# Altium PCB EDR Project PCB_atmega328p.PcbDoc (part 1 of 2)
Units mm, origin at the board's own origin, x right, y up, seen from the top; angles counter-clockwise.
Board outline 105 x 60 mm, 2 copper layers (Top Layer, Bottom Layer); 62 components, 52 nets, 237 pads, 86 vias.
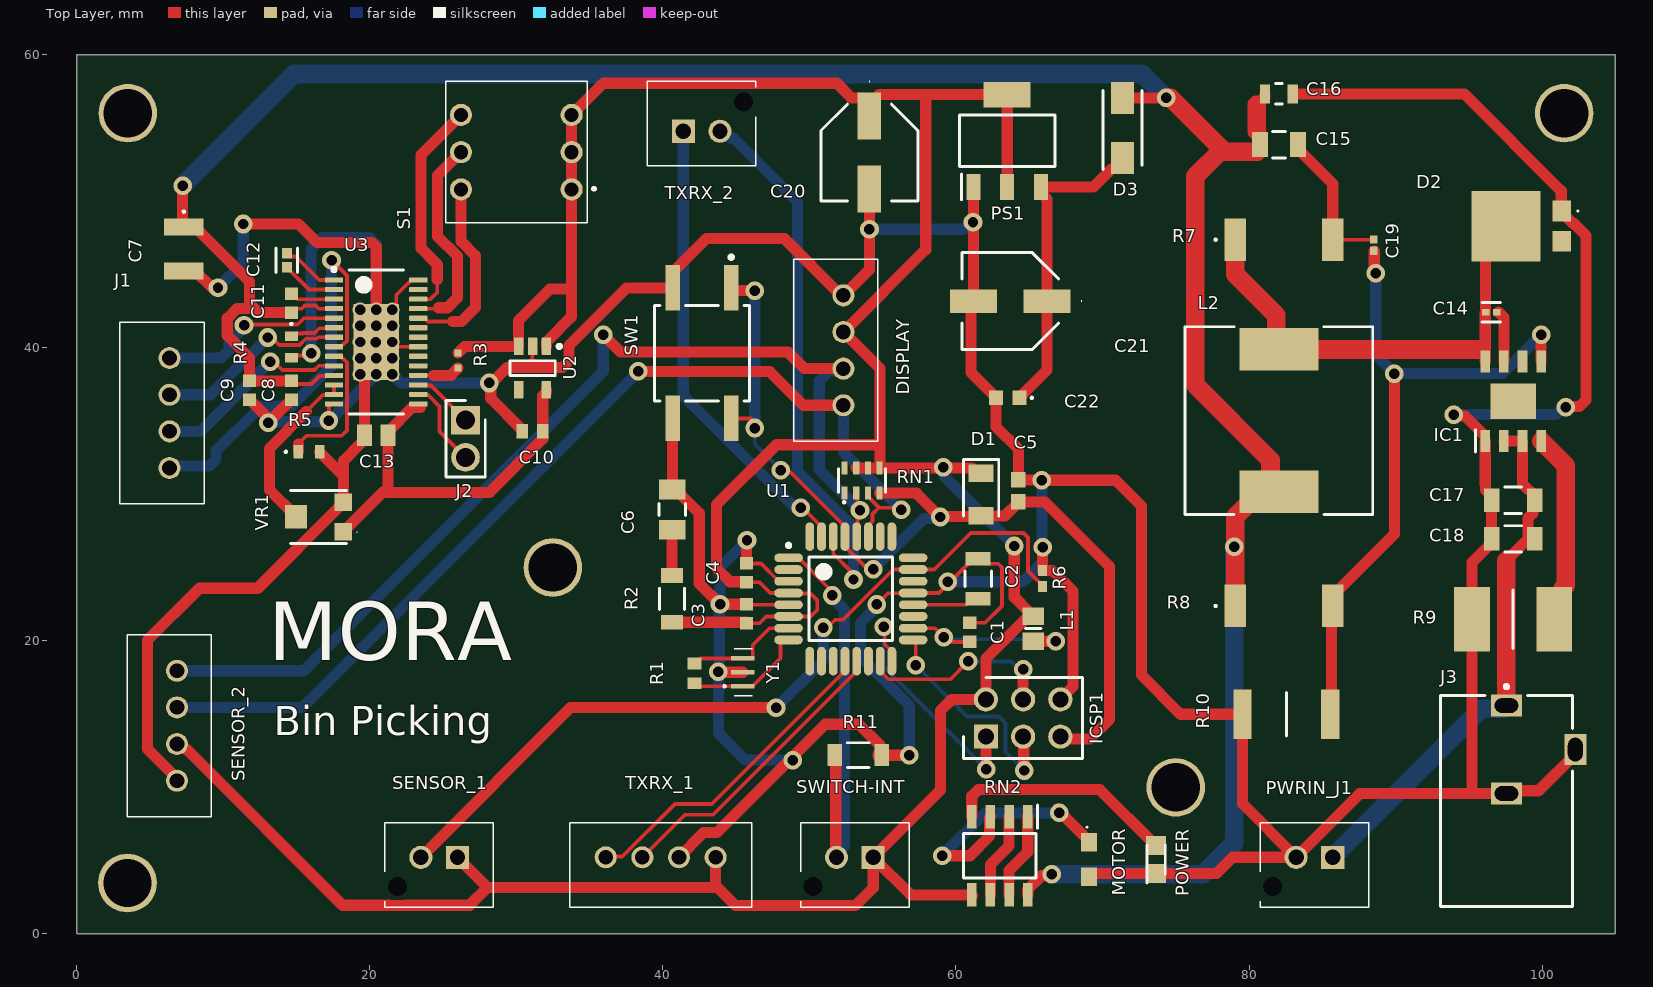
[diagram p0: Top Layer view]
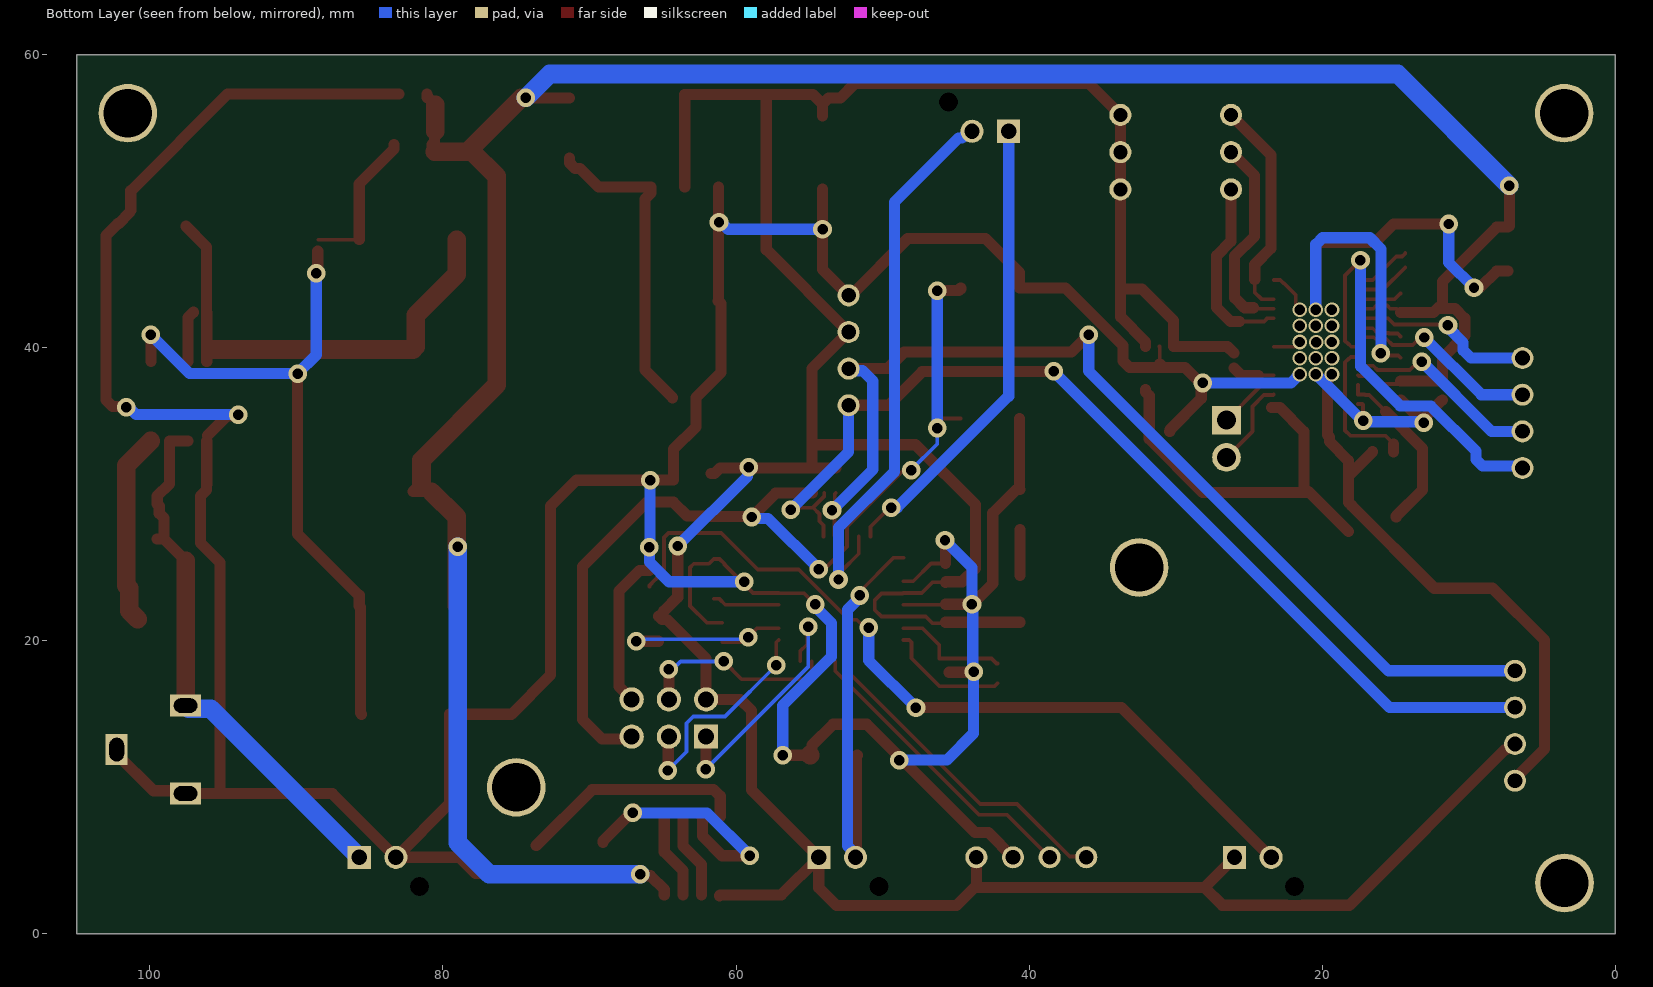
[diagram p1: Bottom Layer view, seen from below]

## Layer stack, top to bottom
Top Solder: solder mask 0.0102, Solder Resist, Dk 3.5
Top Layer: signal copper 0.0356
Dielectric 1: dielectric 0.32, FR-4, Dk 4.8
Bottom Layer: signal copper 0.0356
Bottom Solder: solder mask 0.0102, Solder Resist, Dk 3.5

## Board outline
0,0 105,0 105,60 0,60

## Design rules (kind name [scope] priority, off if disabled: settings)
BoardOutlineClearance [All] p1: gap=0.2 ignorepadtopadclearanceinfootprint=FALSE
Clearance [All] p1: gap=0.127 ignorepadtopadclearanceinfootprint=FALSE except(0.25: Arc-Hole Track-Hole SMDPad-Hole THPad-Hole Via-Hole Fill-Hole Poly-Hole Region-Hole Text-Hole)
ComponentClearance [All] p1: gap=0.127 collisioncheckmode=3 verticalgap=0.127 showdistances=TRUE
Height [All] p1: minheight=0 maxheight=1816.048 prefheight=12.7
HoleSize [All] p1: absolutevalues=TRUE maxlimit=6.3 minlimit=0.3 maxpercent=80.000 minpercent=20.000
HoleToHoleClearance [All] p1: gap=0.2 allowstackedmicrovias=FALSE
MinimumAnnularRing [All] p1: minimumring=0.076
MinimumSolderMaskSliver [All] p1: minsoldermaskwidth=0
PlaneClearance [All] p1: clearance=0.127
PlaneConnect PlaneConnectPowerPads [InPadClass('PowerPads')] p1: planeconnectstyle=Direct reliefexpansion=0.508 reliefentries=4 reliefconductorwidth=0.254 reliefairgap=0.254
PlaneConnect [All] p2: pad.planeconnectstyle=Relief pad.reliefexpansion=0.3 pad.reliefentries=4 pad.reliefconductorwidth=0.127 pad.reliefairgap=0.127 via.planeconnectstyle=Direct via.reliefexpansion=0.3 via.reliefentries=4 via.reliefconductorwidth=0.127 via.reliefairgap=0.127
PolygonConnect [All] p1: connectstyle=Relief reliefconductorwidth=0.254 reliefentries=4 polygonreliefangle="90 Angle" airgapwidth=0.254
RoutingVias [All] p1: holewidth=0.711 width=1.27 viastyle="Through Hole" minholewidth=0.711 minwidth=1.27 maxholewidth=0.711 maxwidth=1.27
SilkToSilkClearance [All] p1: silktosilkclearance=0
SilkToSolderMaskClearance [IsText] p1: minsilkscreentomaskgap=0.127 clearancetoexposedcopper=TRUE
SolderMaskExpansion [All] p1: expansion=0.075 istentingtop=FALSE
Width [All] p1: maxlimit=1.27 minlimit=0.254 preferedwidth=0.762
21 further rules are at their usual default settings.

## Classes and differential pairs
component class UART: DISPLAY TXRX_1 TXRX_2
component class "PRESSURE SENSOR": SENSOR_2
component class POWER: C14 C15 C16 C17 C18 C19 C20 C21 C22 D2 D3 IC1 J3 L2 PS1 PWRIN_J1 R7 R8 R9 R10
component class "MOTOR DRIVER": C7 C8 C9 C10 C11 C12 C13 J1 J2 R3 R4 R5 S1 U2 U3 VR1
component class "MEMBRANE SENSOR": R6 SENSOR_1
component class MCU: C1 C2 C3 C4 C5 C6 D1 ICSP1 L1 MOTOR POWER R1 R2 R11 RN1 RN2 SW1 SWITCH-INT U1 Y1

## Components (designator, comment, footprint, x,y, rotation, side; value= is the part's Value field where it differs from the comment)
C1 "06035C104KAT4A" CAPC1608X90X35LL15T15 60.945,20.574 r270 top value=100nF
C2 "CL31B106KBHNNNE" FP-CL31B106KBHNNNE-MFG 61.52,24.222 r90 top value=10uF
C3 "06035C104KAT4A" CAPC1608X90X35LL15T15 45.718,21.844 r270 top value=100nF
C4 "06035C104KAT4A" CAPC1608X90X35LL15T15 45.718,24.638 r270 top value=100nF
C5 "06035A220JAT4A" CAPC1608X90X35NL15T15 64.26,30.226 r270 top value=22pF
C6 "GRM31C5C1H104JA01L" FP-GRM31C-0_2-e0_3_0_8-IPC_B 40.638,28.956 r90 top
C7 "C1210C475J5RACAUTO" C1210 7.323,46.736 r270 top
C8 "06035C104KAT4A" CAPC1608X90X35LL15T15 14.66,37.084 r90 top value=100nF
C9 "06035C104KAT4A" CAPC1608X90X35LL15T15 11.809,37.084 r90 top value=100nF
C10 "C0603C105K3PACTU." CAPC1608X95N 31.113,34.29 r180 top
C11 "06035C104KAT4A" CAPC1608X90X35LL15T15 14.66,43.038 r270 top value=100nF
C12 "GRM155R71H103JA88D" FP-GRM155-0_05-IPC_A 14.349,45.974 r90 top
C13 "C0805C474J5REC7800" CAPC2012X110N 20.445,34.036 r180 top
C14 "GRM155R71H222JA01D" FP-GRM155-0_05-IPC_C 96.518,42.418 r0 top
C15 "12065C332KAT2A" FP-1206-L_3_2_0_2-W_1_6_0-IPC_C 82.04,53.848 r180 top
C16 "GRM21BR60J226ME39L" FP-GRM21B-0_15-MFG 82.04,57.315 r0 top
C17 "GCM31CR71H225KA55K" FP-GCM31C-0_2-e0_3_0_8-MFG 98.022,29.598 r180 top
C18 "GCM31CR71H225KA55K" FP-GCM31C-0_2-e0_3_0_8-MFG 98.022,26.95 r180 top
C19 "02015C560KAT2A" CAPC0603X33X15ML03T05 88.517,46.99 r90 top
C20 "EEE-1EA470WP" EEE1AA101SP 54.1,53.315 r270 top value=47uF
C21 "EEE-1EA470WP" EEE1AA101SP 63.712,43.18 r180 top value=47uF
C22 "C0603C104K5RAC3190" C0603 63.536,36.576 r180 top
D1 "CD1206-S01575" DIOC3215X95N 61.72,29.972 r270 top
D2 "V8P12-M3_86A" V8P12M386A 98.579,48.284 r90 top
D3 "CGRA4007-G" DIOM5127X229N 71.372,54.99 r90 top
DISPLAY "B4B-XH-A_LF__SN_" B4BXHALFSN 52.322,36.068 r90 top
IC1 "LM5012DDAR" SOIC127P600X170-9N 98.022,36.347 r90 top
ICSP1 "PH2-06-UA" HDRV6W64P254_2X3_762X500X901P 62.044,13.462 r0 top
J1 "B4B-XH-A_LF__SN_" B4BXHALFSN 6.348,31.79 r90 top
J2 "61300211121" HDRV2W110P0X254_1X2_508X254X854P 26.541,35.052 r270 top
J3 "PJ-102BH" CUI-PJ-102BH_V 97.559,12.576 r270 top
L1 "CV201210-100K" INDC2012X145N 65.276,20.828 r270 top
L2 "SRR1280-330M" FP-SRR1280-MFG 82.04,35.028 r270 top
MOTOR "APT2012SECK_J3-PRV" APT2012SECKJ3PRV 69.086,5.08 r270 top
POWER "KPT-2012SGC" LEDM2012X120N 73.658,5.08 r90 top
PS1 "SPX1117M3-L-5-0_TR" SOT230P700X170-4N 63.498,54.115 r90 top
PWRIN_J1 "B2B-XH-AM_LF__SN_" B2BXHAMLFSN 85.708,5.226 r180 top
R1 "ERJ-3GEYJ105V" RESC1608X55X30NL15T15 42.162,17.78 r90 top value=1M
R2 "RT1206BRD0710KL" FP-RT1206-MFG 40.638,22.86 r270 top value=10KΩ
R3 "ERA-2AEB152X" ERA2AED122X 26.033,39.116 r270 top
R4 "ERJ-3RSFR10V" ERJ3_B_BQ_BW_LW_(0603) 14.66,40.042 r270 top
R5 "ERJ-3RSFR10V" ERJ3_B_BQ_BW_LW_(0603) 15.86,32.893 r0 top
R6 "RC0402FR-074K7L" RESC1005X40N 65.911,24.257 r90 top
R7 "ERJ-S1TD4533U" ERJS1T_U1T_(2512) 82.39,47.371 r0 top
R8 "ERJ-S1TD4533U" ERJS1T_U1T_(2512) 82.39,22.377 r0 top
R9 "3540100KJT" RESC7142X120N 98.022,21.463 r180 top
R10 "CRCW251249K9FKEG" RESC6332X70N 82.548,14.986 r180 top
R11 "RT1206BRD0710KL" FP-RT1206-MFG 53.338,12.192 r180 top value=10KΩ
RN1 "CAY16-103J4GLF" CAY16-J4 53.592,30.937 r0 top value=10k
RN2 "AORN1001AT5" SOIC127P607X173-8N 62.99,5.334 r270 top
S1 "BD03" BD03 30.005,53.34 r90 top
SENSOR_1 "B2B-XH-AM_LF__SN_" B2BXHAMLFSN 25.993,5.226 r180 top
SENSOR_2 "B4B-XH-A_LF__SN_" B4BXHALFSN 6.856,10.454 r90 top
SW1 "1571634-2" FP-1571634-2-MFG 42.67,39.624 r270 top
SWITCH-INT "B2B-XH-AM_LF__SN_" B2BXHAMLFSN 54.354,5.226 r180 top
TXRX_1 "B4B-XH-A_LF__SN_" B4BXHALFSN 43.606,5.226 r180 top
TXRX_2 "B2B-XH-AM_LF__SN_" B2BXHAMLFSN 41.4,54.765 r0 top
U1 "ATmega328P-AU" 32A_M 52.83,22.86 r0 top
U2 "LP2985-33DBVR" DBV0005A_M 31.113,38.608 r270 top
U3 "DRV8825PWP" PWP0028C_L 20.445,40.386 r0 top
VR1 "TC33X-2-103E" TC33X2503E 16.51,28.448 r90 top
Y1 "CSTCE16M0V53-R0" CSTCE16M0V53R0 45.464,17.846 r270 top value=16MHz

## Footprints (in the part's own frame and the unit in brackets; to place one, negate y for a bottom-side part, rotate by r counter-clockwise, add the part's x,y. Pads: shape width x height; smd on the part's side, far side on the other; paste and mask are expansions set on the pad)
32A_M [mm] "Thin QFP, 32-Leads, Body 7x7mm, Pitch 0.8mm, IPC Low Density"
  oval 1.95x0.6 smd: 1(-4.25,2.8) 2(-4.25,2) 3(-4.25,1.2) 4(-4.25,0.4) 5(-4.25,-0.4) 6(-4.25,-1.2) 7(-4.25,-2) 8(-4.25,-2.8) 17(4.25,-2.8) 18(4.25,-2) 19(4.25,-1.2) 20(4.25,-0.4) 21(4.25,0.4) 22(4.25,1.2) 23(4.25,2) 24(4.25,2.8)
  oval 0.6x1.95 smd: 9(-2.8,-4.25) 10(-2,-4.25) 11(-1.2,-4.25) 12(-0.4,-4.25) 13(0.4,-4.25) 14(1.2,-4.25) 15(2,-4.25) 16(2.8,-4.25) 25(2.8,4.25) 26(2,4.25) 27(1.2,4.25) 28(0.4,4.25) 29(-0.4,4.25) 30(-1.2,4.25) 31(-2,4.25) 32(-2.8,4.25)
  silkscreen extent -4.37,-2.85 2.85,3.77, body extent -3.5,-3.5 3.5,3.5, height 1.2
APT2012SECKJ3PRV [mm]
  rect 1.25x1.1 smd: 1(-1.175,0) 2(1.175,0)
  silkscreen extent -2.25,-0.2 -2.15,-0.1, body extent -1,-0.63 1,0.63, height 0.85
B2BXHAMLFSN [mm]
  rect 1.575x1.575 hole 1.05: 1(0,0)
  round 1.575 hole 1.05: 2(2.5,0)
  round 0.65 hole 1.3 unplated: MH1(4.1,2)
  silkscreen extent -2.45,-2.35 4.95,3.4, body extent -2.45,-2.36 4.95,3.39, height 6.9
B4BXHALFSN [mm]
  round 1.5 hole 1: 1(0,0) 2(2.5,0) 3(5,0) 4(7.5,0)
  silkscreen extent -2.45,-2.35 9.95,3.4, body extent -2.45,-2.35 9.95,3.4, height 7.52
BD03 [mm]
  round 1.509 hole 0.97: 1(-2.54,-3.775) 2(-2.54,3.775) 3(0,-3.775) 4(0,3.775) 5(2.54,-3.775) 6(2.54,3.775)
  silkscreen extent -4.82,-5.4 4.82,4.82, body extent -4.82,-4.76 4.82,4.88, height 7.42
C0603 [mm]
  rect 0.95x1 smd: 1(-0.8,0) 2(0.8,0)
  silkscreen extent -1.7,-0.05 -1.6,0.05, body extent -0.87,-0.48 0.88,0.47, height 0.87
C1210 [mm]
  rect 1.15x2.7 smd: 1(-1.5,0) 2(1.5,0)
  silkscreen extent -2.6,-0.05 -2.5,0.05, body extent -1.7,-1.35 1.7,1.35, height 1.4
CAPC0603X33X15ML03T05 [mm] "Chip Capacitor, 2-Leads, Body 0.60x0.30mm, IPC Low Density"
  rect 0.56x0.52 smd: 1(-0.38,0) 2(0.38,0)
  body extent -0.31,-0.17 0.32,0.16, height 0.33
CAPC1608X90X35LL15T15 [mm] "Chip Capacitor, 2-Leads, Body 1.60x0.81mm, IPC High Density"
  rect 0.85x0.9 smd: 1(-0.65,0) 2(0.65,0)
  body extent -0.88,-0.48 0.87,0.48, height 0.9
CAPC1608X90X35NL15T15 [mm] "Chip Capacitor, 2-Leads, Body 1.60x0.81mm, IPC Medium Density"
  rect 1.05x1 smd: 1(-0.75,0) 2(0.75,0)
  body extent -0.88,-0.48 0.87,0.48, height 0.9
CAPC1608X95N [mm]
  rect 0.78x0.98 smd: 1(-0.7,0) 2(0.7,0)
  body extent -0.8,-0.4 0.8,0.4, height 0.95
CAPC2012X110N [mm]
  rect 1.02x1.47 smd: 1(-0.8,0) 2(0.8,0)
  body extent -1.1,-0.73 1.1,0.72, height 1.1
CAY16-J4 [mm]
  rect 0.425x0.9 smd: 1(-1.2,-0.85) 2(-1.2,0.85) 3(-0.4,-0.85) 4(-0.4,0.85) 5(0.4,-0.85) 6(0.4,0.85) 7(1.2,-0.85) 8(1.2,0.85)
  silkscreen extent -1.6,-1.53 1.6,0.8, body extent -1.6,-0.78 1.6,0.62, height 0.5
CSTCE16M0V53R0 [mm]
  rect 0.3x1.6 smd: 1(0.95,0) 2(0,0) 3(-0.95,0)
  silkscreen extent -1.6,-1.3 1.6,0.65, body extent -1.6,-0.65 1.6,0.65, height 0.9
CUI-PJ-102BH_V [mm] "THD, 3-Leads, Body 14.4x9mm, Height 11mm"
  rect 1.5x2.1 hole 1 slot 1.6 at 90 deg: 1(-3,0) 2(3,0)
  rect 2.1x1.5 hole 1 slot 1.6 at 0 deg: 3(0,4.7)
  silkscreen extent -4.42,-4.5 10.7,4.5, body extent -3.7,-4.5 10.7,4.9, height 11
DBV0005A_M [mm] "SOT23, 5-Leads, Body 3.05x1.75mm, Pitch 0.95mm, IPC Low Density"
  rrect15% 1.2x0.65 smd: 1(-1.475,0.95) 2(-1.475,0) 3(-1.475,-0.95) 4(1.475,-0.95) 5(1.475,0.95)
  silkscreen extent -1.6,-1.55 0.5,1.95, body extent -1.42,-1.46 1.42,1.46, height 1.08
DIOC3215X95N [mm]
  rect 1.2x1.7 smd: 1(-1.45,0) 2(1.45,0)
  silkscreen extent -2.4,-1.2 1.45,1.2, body extent -1.6,-0.75 1.6,0.75, height 0.95
DIOM5127X229N [mm]
  rect 2.2x1.55 smd: 1(-2.05,0) 2(2.05,0)
  silkscreen extent -2.83,-1.33 2.55,1.33, body extent -2.55,-1.33 2.55,1.33, height 2.29
EEE1AA101SP [mm]
  rect 3.2x1.6 smd: 1(-2.5,0) 2(2.5,0)
  silkscreen extent -4.88,-3.3 3.3,3.3, body extent -3.65,-3.3 3.65,3.3, height 5.8
ERA2AED122X [mm]
  rect 0.475x0.5 smd: 1(-0.512,0) 2(0.512,0)
  body extent -0.5,-0.25 0.5,0.25, height 0.35
ERJ3_B_BQ_BW_LW_(0603) [mm]
  rect 0.65x0.9 smd: 1(-0.725,0) 2(0.725,0)
  silkscreen extent -1.62,-0.05 -1.53,0.05, body extent -0.8,-0.4 0.8,0.4, height 0.55
ERJS1T_U1T_(2512) [mm]
  rect 1.45x2.9 smd: 1(-3.325,0) 2(3.325,0)
  silkscreen extent -4.72,-0.05 -4.62,0.05, body extent -3.2,-1.6 3.2,1.6, height 0.6
FP-1206-L_3_2_0_2-W_1_6_0-IPC_C [mm]
  rect 1.105x1.706 smd paste+0 mask+0: 1(-1.301,0) 2(1.301,0)
  silkscreen extent -0.45,-0.9 0.45,0.9, body extent -1.95,-1 1.95,1, height 0.25
FP-1571634-2-MFG [mm]
  rect 3.1x1 smd paste+0 mask+0: 1(-4.45,2) 2(4.45,2) 3(-4.45,-2) 4(4.45,-2)
  silkscreen extent -6.67,-3.25 3.25,3.25, body extent -6.1,-3.35 6.1,3.35, height 0.25
FP-CL31B106KBHNNNE-MFG [mm]
  rect 0.925x1.7 smd paste+0 mask+0: 1(-1.362,0) 2(1.363,0)
  silkscreen extent -0.53,-0.9 0.53,0.9, body extent -1.92,-1 1.92,1, height 0.25
FP-GCM31C-0_2-e0_3_0_8-MFG [mm]
  rect 1.05x1.6 smd paste+0 mask+0: 1(-1.475,0) 2(1.475,0)
  silkscreen extent -0.57,-0.9 0.58,0.9, body extent -2.1,-1 2.1,1, height 0.25
FP-GRM21B-0_15-MFG [mm]
  rect 0.7x1.3 smd paste+0 mask+0: 1(-0.95,0) 2(0.95,0)
  silkscreen extent -0.22,-0.7 0.22,0.7, body extent -1.4,-0.8 1.4,0.8, height 0.25
FP-GRM31C-0_2-e0_3_0_8-IPC_B [mm]
  rect 1.355x1.806 smd paste+0 mask+0: 1(-1.376,0) 2(1.376,0)
  silkscreen extent -0.4,-0.9 0.4,0.9, body extent -2.3,-1.15 2.3,1.15, height 0.25
FP-GRM155-0_05-IPC_A [mm]
  rect 0.715x0.672 smd paste+0 mask+0: 1(-0.479,0) 2(0.479,0)
  silkscreen extent -0.84,-0.74 0.84,0.74, body extent -1.04,-0.54 1.04,0.54, height 0.25
FP-GRM155-0_05-IPC_C [mm]
  rect 0.515x0.472 smd paste+0 mask+0: 1(-0.379,0) 2(0.379,0)
  silkscreen extent -0.64,-0.67 0.64,0.67, body extent -0.74,-0.38 0.74,0.38, height 0.25
FP-RT1206-MFG [mm]
  rect 1x1.5 smd paste+0 mask+0: 1(-1.6,0) 2(1.6,0)
  silkscreen extent -0.73,-0.85 0.73,0.85, body extent -2.2,-0.95 2.2,0.95, height 0.25
FP-SRR1280-MFG [mm]
  rect 2.9x5.4 smd paste+0 mask+0: 1(-4.85,0) 2(4.85,0)
  silkscreen extent -6.4,-6.4 6.4,6.4, body extent -6.5,-6.5 6.5,6.5, height 0.25
HDRV2W110P0X254_1X2_508X254X854P [mm]
  rect 1.95x1.95 hole 1.3: 1(0,0)
  round 1.95 hole 1.3: 2(2.54,0)
  silkscreen extent -1.34,-1.34 3.88,1.34, body extent -1.27,-1.27 3.81,1.27, height 8.54
HDRV6W64P254_2X3_762X500X901P [mm]
  rect 1.65x1.65 hole 1.1: 1(0,0)
  round 1.65 hole 1.1: 2(0,2.54) 3(2.54,0) 4(2.54,2.54) 5(5.08,0) 6(5.08,2.54)
  silkscreen extent -1.52,-1.48 6.6,4.02, body extent -1.27,-1.23 6.35,3.77, height 9.01
INDC2012X145N [mm]
  rect 1.2x1.45 smd: 1(-0.85,0) 2(0.85,0)
  silkscreen extent 0,-0.53 0,0.53, body extent -1,-0.63 1,0.63, height 1.45
LEDM2012X120N [mm]
  rect 1.3x1.35 smd: 1(-0.95,0) 2(0.95,0)
  silkscreen extent -1.6,-0.62 1,0.62, body extent -1.02,-0.6 1.02,0.6, height 0.77
PWP0028C_L [mm] "SOP, 28-Leads, Body 9.8x4.5mm, Pitch 0.65mm, Thermal Pad 5.18x3.1mm, IPC High Density"
  rrect29% 1.25x0.35 smd: 1(-2.875,4.225) 2(-2.875,3.575) 3(-2.875,2.925) 4(-2.875,2.275) 5(-2.875,1.625) 6(-2.875,0.975) 7(-2.875,0.325) 8(-2.875,-0.325) 9(-2.875,-0.975) 10(-2.875,-1.625) 11(-2.875,-2.275) 12(-2.875,-2.925) 13(-2.875,-3.575) 14(-2.875,-4.225) 15(2.875,-4.225) 16(2.875,-3.575) 17(2.875,-2.925) 18(2.875,-2.275) 19(2.875,-1.625) 20(2.875,-0.975) 21(2.875,-0.325) 22(2.875,0.325) 23(2.875,0.975) 24(2.875,1.625) 25(2.875,2.275) 26(2.875,2.925) 27(2.875,3.575) 28(2.875,4.225)
  rrect3% 3.1x5.18 smd: 29(0,0)
  silkscreen extent -3,-4.9 1.85,5.07, body extent -2.25,-4.9 2.25,4.9, height 1.2
RESC1005X40N [mm]
  rect 0.75x0.6 smd: 1(-0.55,0) 2(0.55,0)
  body extent -0.5,-0.25 0.5,0.25, height 0.4
RESC1608X55X30NL15T15 [mm] "Chip Resistor, 2-Leads, Body 1.60x0.80mm, IPC Medium Density"
  rect 0.8x0.95 smd: 1(-0.675,0) 2(0.675,0)
  body extent -0.87,-0.48 0.87,0.48, height 0.55
RESC6332X70N [mm]
  rect 1.25x3.35 smd: 1(-3,0) 2(3,0)
  silkscreen extent 0,-1.47 0,1.47, body extent -3.15,-1.58 3.15,1.58, height 0.7
RESC7142X120N [mm]
  rect 2.45x4.4 smd: 1(-2.8,0) 2(2.8,0)
  silkscreen extent 0,-2 0,2, body extent -3.55,-2.1 3.55,2.1, height 1.2
SOIC127P600X170-9N [mm]
  rect 1.525x0.65 smd: 1(-2.712,1.905) 2(-2.712,0.635) 3(-2.712,-0.635) 4(-2.712,-1.905) 5(2.712,-1.905) 6(2.712,-0.635) 7(2.712,0.635) 8(2.712,1.905)
  rect 2.4x3.1 smd: 9(0,0)
  silkscreen extent -3.48,2.58 -1.95,2.58, body extent -3,-2.45 3,2.45, height 1.57
SOIC127P607X173-8N [mm]
  rect 1.6x0.65 smd: 1(-2.675,1.905) 2(-2.675,0.635) 3(-2.675,-0.635) 4(-2.675,-1.905) 5(2.675,-1.905) 6(2.675,-0.635) 7(2.675,0.635) 8(2.675,1.905)
  silkscreen extent -3.48,-2.47 1.53,2.58, body extent -3.04,-2.46 3.04,2.46, height 1.73
SOT230P700X170-4N [mm]
  rect 1.75x0.95 smd: 1(-3.15,2.3) 2(-3.15,0) 3(-3.15,-2.3)
  rect 1.75x3.2 smd: 4(3.15,0)
  silkscreen extent -4.02,-3.25 1.75,3.25, body extent -3.5,-3.25 3.5,3.25, height 1.7
TC33X2503E [mm]
  rect 1.2x1.2 smd: 1(-1,-1.7) 3(1,-1.7)
  rect 1.6x1.5 smd: 2(0,1.55)
  silkscreen extent -1.8,-2.64 1.8,1.9, body extent -1.5,-2 1.5,1.8, height 1.22
V8P12M386A [mm]
  rect 1.4x1.27 smd: 1(1.04,-2.765) 2(-1.04,-2.765)
  rect 4.8x4.72 smd: 3(0,1.04)
  silkscreen extent 0.99,-3.9 1.09,-3.8, body extent -2.15,-3.27 2.15,3.05, height 1.3

## Part data
C1 C3 C4 C8 C9 C11: library part CMP-2006-04390-1, Manufacturer="AVX Interconnect / Elco", Part Number=06035C104KAT4A
C2: library part CMP-2000-07530-2, "CAP CER 10UF 50V X7R 1206", Capacitance=10uF, Manufacturer=Samsung, Temperature="-55°C to +125°C", Temperature Characteristic=X7R, Temperature Coefficient=15%, Temperature Range High=+125°C, Temperature Range Low=-55°C, Tolerance=10%, Voltage Rating=50V, Automotive=No, Category=Cap, ComponentLink2Description=Datasheet, ComponentLink2URL=http://www.samsungsem.com/global/front/downloadcms.do?path=%2F%2Fglobal%2F%2Fsupport%2F%2Fproduct-search%2F%2Fmlcc%2F%2F__icsFiles%2F%2Fafieldfile%2F%2F2019%2F%2F06%2F%2F18&fileName=CL31B106KBHNNNE-19.pdf, Device Class L1="Passive Components", Device Class L2=Capacitors, Device Class L3="Ceramic Capacitors", Digikey Description="CAP CER 10UF 50V X7R 1206", Height=1.8mm, Lead Free=Yes, Manufacturer Part Number=CL31B106KBHNNNE, Material=Ceramic, Octopart=https://octopart.com/cl31b106kbhnnne-samsung-30507377, Package=CL31B106KBHNNNE, RoHS=TRUE
C5: library part CMP-2006-04271-1, Manufacturer="AVX Interconnect / Elco", Part Number=06035A220JAT4A
C6: library part CMP-06035-003994-1, "Chip Multilayer Ceramic Capacitors for General Purpose, 1206, 0.10uF, C0G, 30ppm/°C, 5%, 50V", Capacitance=100nF, Case Code (Imperial)=1206, Case Code (Metric)=3216, Dielectric=C0G, Max Operating Temperature=125°C, Min Operating Temperature=-55°C, Package Quantity=1, Temperature Coefficient=30ppm/°C, Tolerance=5%, Voltage=50V, Case/Package=1206, Depth=1.6mm, Height=1.6mm, Lead Free="Lead Free", Length=3.2mm, Material=Ceramic, Mount="Surface Mount", Packaging="Tape and Reel", Radiation Hardening=No, REACH SVHC="No SVHC", Termination=SMD/SMT, Thickness=0.071inch, Voltage Rating=50V, Voltage Rating (DC)=50V, Weight=0.000571oz, Width=0.063inch
C7: "Capacitor", Capacitance=4..7uF, Manufacturer_Name=KEMET, Mouser Part Number=80-C1210C475J5RAUTO, Datasheet Link=https://content.kemet.com/datasheets/KEM_C1023_X7R_AUTO_SMD.pdf, Manufacturer_Part_Number=C1210C475J5RACAUTO, Mouser Price/Stock=https://www.mouser.co.uk/ProductDetail/KEMET/C1210C475J5RACAUTO?qs=sSYV1F9c5cHOvq7Y3pUhfA%3D%3D
C10: "Capacitor", Capacitance=1uF, Manufacturer_Name=KEMET, Mouser Part Number=N/A, Datasheet Link=https://www.kemet.com/specsheet/C0603C105K3PACTU, Height=0.95mm, Manufacturer_Part_Number=C0603C105K3PACTU., Mouser Price/Stock=https://www.mouser.com/Search/Refine.aspx?Keyword=N%2FA
C12: library part CMP-2008-04636-2, "Chip Multilayer Ceramic Capacitors for General Purpose, 0402, 10000pF, X7R, 15%, 5%, 50V", Capacitance=10nF, Case Code (Imperial)=0402, Case Code (Metric)=1005, Dielectric=X7R, Max Operating Temperature=125°C, Min Operating Temperature=-55°C, Package Quantity=10000, Tolerance=5%, Voltage=50V, Case/Package=0402, Depth=0.5mm, Height=0.5mm, Lead Free="Lead Free", Length=1mm, Material=Ceramic, Mount="Surface Mount", Packaging="Tape and Reel", Termination=SMD/SMT, Thickness=0.022inch, Voltage Rating=50V, Voltage Rating (DC)=50V, Width=0.5mm
C13: "Capacitor", Capacitance=0.47uF, Manufacturer_Name=KEMET, Mouser Part Number=N/A, Datasheet Link=https://api.kemet.com/component-edge/download/datasheet/C0805C474J5REC7800.pdf, Height=1.1mm, Manufacturer_Part_Number=C0805C474J5REC7800, Mouser Price/Stock=https://www.mouser.co.uk/ProductDetail/KEMET/C0805C474J5REC7800?qs=xZ%2FP%252Ba9zWqYCFwa%2FovZJlA%3D%3D
C14: library part CMP-2008-04651-2, "Chip Multilayer Ceramic Capacitors for General Purpose, 0402, 2200pF, X7R, 15%, 5%, 50V", Capacitance=2.2nF, Case Code (Imperial)=0402, Case Code (Metric)=1005, Dielectric=X7R, Max Operating Temperature=125°C, Min Operating Temperature=-55°C, Package Quantity=10000, Tolerance=5%, Voltage=50V, Case/Package=0402, Depth=0.5mm, Height=0.5mm, Lead Free="Lead Free", Length=1mm, Mount="Surface Mount", Packaging="Tape and Reel", Radiation Hardening=No, Termination=SMD/SMT, Thickness=0.022inch, Voltage Rating=50V, Voltage Rating (DC)=50V, Width=0.02inch
C15: library part CMP-04427-015080-1, "General Purpose Ceramic Capacitor, 1206, 3.3nF, 10%, X7R, 15%, 50V", Capacitance=3.3nF, Case Code (Imperial)=1206, Case Code (Metric)=3216, Dielectric=X7R, Dielectric Material=Ceramic, Max Operating Temperature=125°C, Min Operating Temperature=-55°C, Package Quantity=1, Tolerance=10%, Voltage=50V, Case/Package=1206, Construction=Flat, Contact Plating=Tin, Depth=1.6mm, Dissipation Factor=2.5%, Height=0.94mm, Lead Free="Lead Free", Length=3.2mm, Mount="Surface Mount", Number of Pins=2, Packaging="Tape and Reel", REACH SVHC="No SVHC", RoHS Compliant=Yes, Series=-, Termination=SMD/SMT, Thickness=0.037inch, Voltage Rating=50V, Voltage Rating (DC)=50V, Width=1.6mm
C16: library part CMP-2007-03385-2, "Chip Multilayer Ceramic Capacitors for General Purpose, 0805, 22uF, X5R, 15%, 20%, 6.3V", Capacitance=22uF, Case Code (Imperial)=0805, Case Code (Metric)=2012, Dielectric=X5R, Max Operating Temperature=85°C, Min Operating Temperature=-55°C, Package Quantity=1, Tolerance=20%, Voltage=6.3V, Case/Package=0805, Depth=1.25mm, Height=1.25mm, Lead Free="Lead Free", Length=2mm, Material=Ceramic, Mount="Surface Mount", Packaging="Tape and Reel", Radiation Hardening=No, REACH SVHC="No SVHC", Termination=SMD/SMT, Thickness=0.053inch, Voltage Rating=6.3V, Voltage Rating (DC)=6.3V, Width=0.049inch
C17 C18: library part CMP-06035-059276-1, "Ceramic Capacitor for Automotive 2.2uF ±10% 50VDC X7R 1206 Embossed T/R", Capacitance=2.2uF, Case Code (Imperial)=1206, Case Code (Metric)=3216, Dielectric=X7R, Max Operating Temperature=125°C, Min Operating Temperature=-55°C, Package Quantity=6000, Ratings=AEC-Q200, Tolerance=10%, Voltage Rating=50V, Case/Package=1206, Depth=1.6mm, Height=1.6mm, Lead Free="Lead Free", Length=3.2mm, Mount="Surface Mount", Packaging="Tape and Reel", Radiation Hardening=No, Termination=SMD/SMT, Thickness=0.071inch, Voltage Rating (DC)=50V, Width=0.063inch
C19: library part CMP-2010-00470-1, Capacitance=56pF, Manufacturer="AVX Interconnect / Elco", Part Number=02015C560KAT2A
C20 C21: "Capacitor Polarised", Manufacturer_Name=Panasonic, Mouser Part Number=667-EEE-1EA470WP, Voltage=25V, Arrow Part Number=EEE-1EA470WP, Arrow Price/Stock=https://www.arrow.com/en/products/eee-1ea470wp/panasonic?region=nac, Datasheet Link=http://industrial.panasonic.com/cdbs/www-data/pdf/RDE0000/ABA0000C1145.pdf, Height=7.8mm, Manufacturer_Part_Number=EEE-1EA470WP, Mouser Price/Stock=https://www.mouser.co.uk/ProductDetail/Panasonic/EEE-1EA470WP?qs=ANJC8C65Mw4aAM55A7BE%2Fw%3D%3D
C22: "Capacitor", Capacitance=100nF, Manufacturer_Name=KEMET, Mouser Part Number=80-C0603C104K5R3190, Arrow Part Number=C0603C104K5RAC3190, Arrow Price/Stock=https://www.arrow.com/en/products/c0603c104k5rac3190/kemet-corporation?region=nac, Datasheet Link=https://content.kemet.com/datasheets/KEM_C1023_X7R_AUTO_SMD.pdf, Height=0.87mm, Manufacturer_Part_Number=C0603C104K5RAC3190, Mouser Price/Stock=https://www.mouser.co.uk/ProductDetail/KEMET/C0603C104K5RAC3190?qs=OycAS1CGnljhMsmpVYrMLA%3D%3D
D1: "Diode", Manufacturer_Name=Bourns, Mouser Part Number=652-CD1206-S01575, Arrow Part Number=CD1206-S01575, Arrow Price/Stock=https://www.arrow.com/en/products/cd1206-s01575/bourns, Datasheet Link=https://datasheet.datasheetarchive.com/originals/distributors/SFDatasheet-7/sf-000140098.pdf, Height=0.95mm, Manufacturer_Part_Number=CD1206-S01575, Mouser Price/Stock=https://www.mouser.co.uk/ProductDetail/Bourns/CD1206-S01575?qs=FITO%2F%2FQgYDlGQsqciGRLTg%3D%3D
D2: "Diode", Arrow Part Number=V8P12-M3/86A, Manufacturer_Name=Vishay, Mouser Part Number=78-V8P12-M3/86A, Arrow Price/Stock=https://www.arrow.com/en/products/v8p12-m386a/vishay?region=nac, Datasheet Link=https://www.vishay.com/docs/89170/v8p12.pdf, Height=1.2mm, Manufacturer_Part_Number=V8P12-M3/86A, Mouser Price/Stock=https://www.mouser.co.uk/ProductDetail/Vishay-General-Semiconductor/V8P12-M3-86A?qs=HSPD0Bff7iYR%2FGS73JOLOg%3D%3D, Name="Schottkey diode"
D3: "Integrated Circuit", Manufacturer_Name="Comchip Technology", Mouser Part Number=750-CGRA4007-G, Arrow Part Number=CGRA4007-G, Arrow Price/Stock=https://www.arrow.com/en/products/cgra4007-g/comchip-technology, Datasheet Link=http://www.mouser.com/datasheet/2/80/CGRA4001-G_Thru647977._CGRA4007-G_RevE-1481051.pdf, Height=2.29mm, Manufacturer_Part_Number=CGRA4007-G, Mouser Price/Stock=https://www.mouser.co.uk/ProductDetail/Comchip-Technology/CGRA4007-G?qs=tw%252BuQ%2FB6PO1Jgp22ji8v0g%3D%3D
DISPLAY J1 SENSOR_2 TXRX_1: "Connector", Arrow Part Number=B4B-XH-A(LF)(SN), Manufacturer_Name="JST (JAPAN SOLDERLESS TERMINALS)", Arrow Price/Stock=https://www.arrow.com/en/products/b4b-xh-a-lf-sn/jst-manufacturing?region=europe, Datasheet Link=https://datasheet.lcsc.com/szlcsc/JST-Sales-America-B4B-XH-A-LF-SN_C144395.pdf, Height=7mm, Manufacturer_Part_Number=B4B-XH-A(LF)(SN)
  DISPLAY: Name="OLED DISPLAY"
  J1: Name=STEPPER
  SENSOR_2: Name="PRESSURE SENSOR"
  TXRX_1: Name=2-JST
IC1: "Integrated Circuit", Manufacturer_Name="Texas Instruments", Mouser Part Number=595-LM5012DDAR, Arrow Part Number=LM5012DDAR, Arrow Price/Stock=https://www.arrow.com/en/products/lm5012ddar/texas-instruments?region=nac, Datasheet Link=https://www.ti.com/lit/ds/symlink/lm5012.pdf?ts=1682242115443&ref_url=https%253A%252F%252Fwww.ti.com%252Fproduct%252FLM5012, Height=1.7mm, Manufacturer_Part_Number=LM5012DDAR, Mouser Price/Stock=https://www.mouser.co.uk/ProductDetail/Texas-Instruments/LM5012DDAR?qs=T%252BzbugeAwjjzO1eNFM2OsQ%3D%3D
ICSP1: "Connector", Manufacturer_Name="Adam Tech", Arrow Part Number=PH2-06-UA, Arrow Price/Stock=https://www.arrow.com/en/products/ph2-06-ua/adam-tech?region=nac, Datasheet Link=https://datasheet.datasheetarchive.com/originals/distributors/Datasheets_SAMA/c63e3fe101e7b6e3957e7ad4a1a98367.pdf, Height=9.008mm, Manufacturer_Part_Number=PH2-06-UA
J2: "Connector", Manufacturer_Name="Wurth Elektronik", Mouser Part Number=710-61300211121, Datasheet Link=https://componentsearchengine.com/Datasheets/2/61300211121.pdf, Height=8.54mm, Manufacturer_Part_Number=61300211121, Mouser Price/Stock=https://www.mouser.co.uk/ProductDetail/Wurth-Elektronik/61300211121?qs=t4813l51qx%252B1A5GYDQxPlw%3D%3D
J3: library part CMP-2000-06901-1, "Through Hole Right Angle DC Power Jack, 5 A, 2.5 mm Center Pin, 3 Position, -25 to 85 degC, RoHS, Bulk", Current Rating=5A, Flammability Rating=UL94V-0, Insulation Resistance=100MOhms, Manufacturer=CUIInc., Operating Temperature Range=-25Cto+85C, Package Description="3-Pin Through Hole Device, Body 14.4 x 9 mm, Height 11 mm", Voltage Rating=24V, Brand=CUI, Connector Type=DCPowerJack, Contact Gender=Male, Contact Material=Copper, Contact Plating=Nickel, Datasheet URL=http://www.cui.com/product/resource/pj-102bh.pdf, Datasheet Version="Rev. 1.02, 05/2016", Factory Pack Quantity=280, Housing Material=PolybutyleneTerephthalate(PBT), Inside Contact Diameter=2.5mm, Manufacturer URL=http://www.cui.com/, Mounting Angle=Right, Mounting Style=ThroughHole, Mounting Technology=ThroughHole, Name=PWRIN, Outside Contact Diameter=6.5mm, Package Reference=PJ-102BH, Product=Jacks, Product Category=DCPowerConnectors, RoHS=True, Termination Style=ThroughHole
L1: "Inductor", Manufacturer_Name=Bourns, Mouser Part Number=652-CV201210-100K, Arrow Part Number=CV201210-100K, Arrow Price/Stock=https://www.arrow.com/en/products/cv201210-100k/bourns?region=nac, Datasheet Link=https://www.bourns.com/docs/Product-Datasheets/CV201210.pdf, Height=1.45mm, Manufacturer_Part_Number=CV201210-100K, Mouser Price/Stock=https://www.mouser.co.uk/ProductDetail/Bourns/CV201210-100K?qs=k2%252BVLg4AuuRLt64STpwovw%3D%3D
L2: library part CMP-2000-07148-2, "FIXED IND 33UH 3.5A 57 MOHM SMD", Case/Package=Nonstandard, Current Rating=3.5A, DC Resistance (DCR)=57mR, Frequency=9.5MHz, Inductance=33uH, Inductance Tolerance=20%, Max Operating Temperature=125°C, Min Operating Temperature=-40°C, Package Quantity=400, Resistance=57MR, Resistor Type=Wirewound, Saturation Current=3.3A, Test Frequency=100kHz, Core Material=Ferrite, DC Current=3.5A, Depth=12.8mm, Height=7.5mm, Height - Seated (Max)=0.315inch, Length=12.5mm, Material=Steel, Max DC Current=3.5A, Military Standard=Not, Mount="Surface Mount", Number of Pins=2, Packaging="Tape and Reel", Q Factor=28, Radiation Hardening=No, REACH SVHC="No SVHC", RMS Current (Irms)=3.5A, RoHS Compliant=Yes, Sample Rate (Hz)=100kHz, Self Resonant Frequency=9.5MHz, Series=SRR1280, Shielding=Shielded, Termination=SMD/SMT, Tolerance=20%, Width=12.5mm
MOTOR: "LED", Arrow Part Number=APT2012SECK/J3-PRV, COLOR=RED, Manufacturer_Name=Kingbright, Mouser Part Number=604-APT2012SECKJ3PRV, Arrow Price/Stock=https://www.arrow.com/en/products/apt2012seckj3-prv/kingbright?region=nac, Datasheet Link=https://www.mouser.de/datasheet/2/216/APT2012SECK-J3-PRV-1173389.pdf, Height=0.85mm, Manufacturer_Part_Number=APT2012SECK/J3-PRV, Mouser Price/Stock=https://www.mouser.co.uk/ProductDetail/Kingbright/APT2012SECK-J3-PRV?qs=D2TOvUWgdJ6T9J6WfI%252BQOg%3D%3D
POWER: "LED", COLOR=GREEN, Manufacturer_Name=Kingbright, Mouser Part Number=N/A, Arrow Part Number=KPT-2012SGC, Arrow Price/Stock=https://www.arrow.com/en/products/kpt-2012sgc/kingbright?region=europe, Datasheet Link=https://componentsearchengine.com/Datasheets/2/KPT-2012SGC.pdf, Height=1.2mm, Manufacturer_Part_Number=KPT-2012SGC, Mouser Price/Stock=https://www.mouser.co.uk/ProductDetail/Kingbright/KPT-2012SGC?qs=2JU0tDl2GZ3Evsz5LVxRxw%3D%3D
PS1: "Power Supply", Arrow Part Number=SPX1117M3-L-5-0/TR, Manufacturer_Name=EXAR, Mouser Part Number=701-SPX1117M3-L-50TR, Arrow Price/Stock=https://www.arrow.com/en/products/spx1117m3-l-5-0tr/exar, Datasheet Link=https://datasheet.datasheetarchive.com/originals/distributors/Datasheets-DGA25/1769206.pdf, Height=1.7mm, Manufacturer_Part_Number=SPX1117M3-L-5-0/TR, Mouser Price/Stock=https://www.mouser.com/Search/Refine.aspx?Keyword=701-SPX1117M3-L-50TR, Name="REG IC"
PWRIN_J1 SENSOR_1 SWITCH-INT TXRX_2: "Connector", Arrow Part Number=B2B-XH-AM(LF)(SN), Manufacturer_Name="JST (JAPAN SOLDERLESS TERMINALS)", Arrow Price/Stock=https://www.arrow.com/en/products/b2b-xh-am-lf-sn/jst-manufacturing?region=europe, Datasheet Link=https://www.jst-mfg.com/product/pdf/eng/eXH.pdf, Height=7mm, Manufacturer_Part_Number=B2B-XH-AM(LF)(SN), Name=2-JST
R1: library part CMP-2000-00706-1, Manufacturer=Panasonic, Part Number=ERJ-3GEYJ105V
R2 R11: library part CMP-2003-04273-2, "RES 10.0K OHM 1/4W .1% SMD 1206", Manufacturer=Yageo, Package=RT1206, Power Rating=0.25W, Resistance=10KΩ, Temperature="-55°C to +155°C", Temperature Coefficient="25 ppm/°C", Temperature Range High=+155°C, Temperature Range Low=-55°C, Tolerance=0.005, Voltage Rating=200V, Automotive=No, Category=Res, ComponentLink2Description=Datasheet, ComponentLink2URL=http://www.yageo.com/documents/recent/PYu-RT_1-to-0.01_RoHS_L_9.pdf, Composition="Thin Film", Device Class L1="Passive Components", Device Class L2=Resistors, Device Class L3="Chip SMD Resistors", Digikey Description="RES 10.0K OHM 1/4W .1% SMD 1206", Footprint Url=http://www.yageo.com/exep/pages/download/literatures/PYu-R_Mount_10.pdf, Height=0.65mm, Ipc Land Pattern Name=RESC310160X55, Lead Free=Yes, Manufacturer Part Number=RT1206BRD0710KL, Mouser Description="High Precision-High Stability Chip Resistor Thin Film 1206 10kOhm 0.1% Paper T/R", Octopart=https://octopart.com/rt1206brd0710kl-yageo-1397513, RoHS=TRUE, Series=RT
R3: "Resistor", Manufacturer_Name=Panasonic, Mouser Part Number=667-ERA-2AEB152X, Resistance=1.5k, Arrow Part Number=ERA-2AEB152X, Arrow Price/Stock=https://www.arrow.com/en/products/era-2aeb152x/panasonic?region=nac, Datasheet Link=http://industrial.panasonic.com/cdbs/www-data/pdf/RDM0000/AOA0000C307.pdf, Height=0.4mm, Manufacturer_Part_Number=ERA-2AEB152X, Mouser Price/Stock=https://www.mouser.co.uk/ProductDetail/Panasonic/ERA-2AEB152X?qs=YFwoyZoVY0iUWeAxCO29sQ%3D%3D
R4 R5: "Resistor", Manufacturer_Name=Panasonic, Mouser Part Number=667-ERJ-3RSFR10V, Resistance=0.1ohm, Arrow Part Number=ERJ-3RSFR10V, Arrow Price/Stock=https://www.arrow.com/en/products/erj-3rsfr10v/panasonic?region=nac, Datasheet Link=http://industrial.panasonic.com/cdbs/www-data/pdf/RDN0000/AOA0000C313.pdf, Manufacturer_Part_Number=ERJ-3RSFR10V, Mouser Price/Stock=https://www.mouser.co.uk/ProductDetail/Panasonic/ERJ-3RSFR10V?qs=aGgfWYEhH7mX3YEBaR1Eig%3D%3D
R6: "Resistor", Manufacturer_Name=KEMET, Mouser Part Number=603-RC0402FR-074K7L, Resistance=4.7k, Arrow Part Number=RC0402FR-074K7L, Arrow Price/Stock=https://www.arrow.com/en/products/rc0402fr-074k7l/yageo, Datasheet Link=http://www.yageo.com/documents/recent/PYu-RC0402_51_RoHS_L_6_r.pdf, Height=0.4mm, Manufacturer_Part_Number=RC0402FR-074K7L, Mouser Price/Stock=https://www.mouser.co.uk/ProductDetail/YAGEO/RC0402FR-074K7L?qs=V1yeUXFNrkn%2FmCXC8N8TTA%3D%3D
R7 R8: "Resistor", Manufacturer_Name=Panasonic, Resistance=453k, Datasheet Link=https://industrial.panasonic.com/cdbs/www-data/pdf/RDP0000/AOA0000C334.pdf, Height=0.7mm, Manufacturer_Part_Number=ERJ-S1TD4533U
R9: "Resistor", Manufacturer_Name="TE Connectivity", Resistance=100k, Datasheet Link=https://www.te.com/commerce/DocumentDelivery/DDEController?Action=srchrtrv&DocNm=1773204-5&DocType=Data%20Sheet&DocLang=English&PartCntxt=3-2176402-2&DocFormat=pdf, Height=1.2mm, Manufacturer_Part_Number=3540100KJT
R10: "Resistor", Manufacturer_Name=Vishay, Mouser Part Number=71-CRCW2512-49.9K-E3, Resistor=49.9k, Datasheet Link=http://www.vishay.com/docs/20035/dcrcwe3.pdf, Height=0.7mm, Manufacturer_Part_Number=CRCW251249K9FKEG, Mouser Price/Stock=https://www.mouser.com/Search/Refine.aspx?Keyword=71-CRCW2512-49.9K-E3
RN1: "Resistor Network", Manufacturer_Name=Bourns, Mouser Part Number=652-CAY16-103J4GLF, Arrow Part Number=CAY16-103J4GLF, Arrow Price/Stock=https://www.arrow.com/en/products/cay16-103j4glf/bourns, Datasheet Link=http://www.bourns.com/docs/Product-Datasheets/CATCAY.pdf, Manufacturer_Part_Number=CAY16-103J4GLF, Mouser Price/Stock=https://www.mouser.co.uk/ProductDetail/Bourns/CAY16-103J4GLF?qs=ehdiChDUEdVKSWacpiiZig%3D%3D
RN2: "Resistor Network", Manufacturer_Name=Vishay, Mouser Part Number=71-AORN1001AT5, Datasheet Link=https://www.vishay.com/docs/60127/aorn.pdf, Height=1.73mm, Manufacturer_Part_Number=AORN1001AT5, Mouser Price/Stock=https://www.mouser.co.uk/ProductDetail/Vishay-Thin-Film/AORN1001AT5?qs=%252BSAr7%2F7Y%2FDjyCR3gKJzY4A%3D%3D
S1: "Switch", Manufacturer_Name="C & K COMPONENTS", Mouser Part Number=611-BD03, Arrow Part Number=BD03, Arrow Price/Stock=https://www.arrow.com/en/products/bd03/ck?region=nac, Datasheet Link=https://www.ckswitches.com/media/1331/bd.pdf, Manufacturer_Part_Number=BD03, Mouser Price/Stock=https://www.mouser.co.uk/ProductDetail/CK/BD03?qs=mh%2FGhdZp9qUYvDBbhZvRdQ%3D%3D, Name="DIP SWITCH"
SW1: library part CMP-03407-000008-1, "SWITCH TACTILE SPST-NO 0.05A 24V", Actuator Color=Natural, Case/Package=SMD/SMT, Contact Current Rating=50mA, Max Operating Temperature=85°C, Max Voltage Rating (DC)=12V, Min Operating Temperature=-40°C, Operating Force=160gf, Package Quantity=1000, Actuator Length=0.094inch, Actuator Material=Rubber, Actuator Type=Standard, Contact Material="Stainless Steel", Contact Plating=Silver, Current Rating=50mA, Depth=10mm, ELV=Compliant, Illumination Type=Illuminated, Lead Free="Lead Free", Length=6.2mm, Max Current Rating=50mA, Mechanical Life=5000000Cycles, Mount="Surface Mount", Orientation=Straight, Packaging="Tape and Reel", Radiation Hardening=No, RoHS Compliant=Yes, Switch Function=Off-Mom, Termination="Gull Wing", Throw Configuration=SPST, Type=Switch, Voltage Rating (DC)=12V
U1: library part CMP-0095-00269-2, "8-bit AVR Microcontroller, 32KB Flash, 1KB EEPROM, 2KB SRAM, 32-pin TQFP, Industrial Grade (-40°C to 85°C)", Code_JEDEC=MS-026-ABA, ComponentLink1Description="Manufacturer URL", ComponentLink1URL=http://www.atmel.com/, ComponentLink2Description="ATmega48A/48PA/88A/88PA/168A/168PA/328/328P Datasheet", ComponentLink2URL=http://www.atmel.com/dyn/resources/prod_documents/doc8271.pdf, ComponentLink3Description="ATmega48A/48PA/88A/88PA/168A/168PA/328/328P Summary", ComponentLink3URL=http://www.atmel.com/dyn/resources/prod_documents/8271S.pdf, DatasheetVersion="revD, May-2011", PackageDescription="32-Lead, 7x7x1.0 mm Body, 0.8mm Lead Pitch, Thin Profile Plastic Quad Flat Package (TQFP)", PackageReference=32A, PackageVersion="revC, Oct-2010", RevisionNote="DatasheetVersion & PackageVersion updated. URLs added."
U2: library part CMP-0758-00080-2, "Single Output Low Noise LDO, 150 mA, Fixed 3.3 V Output, 1.5% Tolerance, 2.2 to 16 V Input, Low IQ, 5-Pin SOT-23 (DBV), -40 to 125 degC, Green (RoHS & no Sb/Br), Tape and Reel", Manufacturer="Texas Instruments", Operating Temperature Range (degC)="-40 to 125", Accuracy (%)=1.5, ComponentLink1Description="Manufacturer URL", ComponentLink1URL=http://www.ti.com/, ComponentLink2Description=Datasheet, ComponentLink2URL=http://www.ti.com/lit/ds/symlink/lp2985-50.pdf, ComponentLink3Description="Package Specification", ComponentLink3URL=http://www.ti.com/litv/pdf/mpds018j, DatasheetVersion=SLVS522N, Fixed Output Options (V)=3.3, Iout (Max) (A)=0.15, Iq (Typ) (mA)=0.85, Mounting Technology="Surface Mount", Name="5V TO 3.3V REG", Output Options="Fixed Output", PackageDescription="5-Pin Plastic Small Outline, Body 2.9 x 1.6 mm, Pitch 0.95 mm", PackageReference=DBV0005A, PackageVersion=4073253-4/L, Packing="Tape and Reel", PartNumber=LP2985-33DBVR, RoHS=TRUE, Vdo (Typ) (mV)=280, Vin (V)="2.2 to 16"
U3: library part CMP-1685-00019-1, "Stepper Motor Controller IC, 8.2 to 45 V, -40 to 85 degC, 28-Pin HTSSOP (PWP), Green (RoHS & no Sb/Br), Tube", Capacitance="47 uF", Case\Package=Radial, Max Operating Temperature="85 degC", Min Operating Temperature="-40 degC", Package Quantity=200, Tolerance=20%, Voltage Rating="100 V", ComponentLink1Description="Manufacturer URL", ComponentLink1URL=http://www.ti.com/, ComponentLink2Description=Datasheet, ComponentLink2URL=http://www.ti.com/general/docs/lit/getliterature.tsp?genericPartNumber=DRV8825&fileType=pdf, DatasheetVersion="SLVSA73F, 07/2014", Diameter="8 mm", Height="11.5 mm", Lead Pitch="3.5 mm", Length="11.5 mm", Mount="Through Hole", PackageDescription="28-Pin Small Outline Package Integrated Circuit, Body 9.7 x 4.4 mm, Pitch 0.65 mm", PackageReference=PWP0028C, Packaging=Bulk, Pins=2, Radiation Hardening=No, REACH SVHC="No SVHC", RoHSCompliant=true, Voltage Rating (DC)="100 V", Width="8 mm"
VR1: "Variable Resistor", Manufacturer_Name=Bourns, Mouser Part Number=652-TC33X-2-103E, Arrow Part Number=TC33X-2-103E, Arrow Price/Stock=https://www.arrow.com/en/products/tc33x-2-103e/bourns?region=nac, Datasheet Link=https://www.bourns.com/pdfs/TC33.pdf, Height=1.2mm, Manufacturer_Part_Number=TC33X-2-103E, Mouser Price/Stock=https://www.mouser.co.uk/ProductDetail/Bourns/TC33X-2-103E?qs=fmZCN1JtwVHu68GrI%2FXOWQ%3D%3D, Name="Variable Res."
Y1: "Crystal or Oscillator", Manufacturer_Name="Murata Electronics", Mouser Part Number=81-CSTCE16M0V53-R0, Datasheet Link=https://www.murata.com/en-sg/products/productdetail?partno=CSTCE16M0V53-R0, Height=1mm, Manufacturer_Part_Number=CSTCE16M0V53-R0, Mouser Price/Stock=https://www.mouser.co.uk/ProductDetail/Murata-Electronics/CSTCE16M0V53-R0?qs=HPA2Xx%252BU0WhPWbRcNuzhZw%3D%3D

## Free pads (board coordinates)
  round 4 hole 3.3: 2(3.475,3.475) 2(3.5,56) 2(3.5,56) 2(32.5,25) 2(75,10) 2(101.5,56)

## Via types
v1: diameter 1.27, hole 0.711, Top Layer to Bottom Layer, 56 vias
v2: diameter 1, hole 0.711, Top Layer to Bottom Layer, 15 vias
v3: diameter 0.5, hole 0.2, Top Layer to Bottom Layer, 15 vias

## Nets (pads, with @x,y where several pads share a name; then routed paths per layer and width w, separated by ;. In a path a pad name is that pad's centre, name@x,y a point inside that pad or via, vN(x,y) a via of type N, cw(c..) or ccw(c..) an arc to the next point about the centre after c; other vN are vias at no path point)
3V3: C10.1 C13.1 U2.5 U3.15 VR1.1 | length 26.3
  Top Layer w0.762: VR1.1 20.946,30.184 ; 21.006,30.124 21.245,30.124 28.169,30.124 31.804,33.76 31.804,34.281 C10.1 31.813,36.72 32.063,36.97 U2.5 ; 21.245,30.483 C13.1 21.245,34.261 22.9,35.916 23.47,35.916
+12: C7.1 C8.2 C9.2 C11.2 C15.2 C16.1 D3.2 L2.2 R8.1 RN2.8 U3.4 U3.11 | length 188.2
  Top Layer w0.254: C8.2 14.878,37.516 16.027,37.516 16.575,38.063 17.522,38.063 U3.11 ; C11.2 14.933,42.661 15.374,42.661 15.583,42.87 16.319,42.87 16.528,42.661 U3.4 U3.4@17.618,42.613
  Top Layer w0.762: v1(7.239,51.054) 7.239,48.32 C7.1 8.098,48.236 11.811,44.523 11.811,42.991 12.113,42.69 ; C8.2 C9.2 11.809,39.302 10.287,40.824 10.287,42.002 10.957,42.672 11.903,42.672 11.921,42.69 12.113,42.69 ; C11.2 12.414,42.388 12.113,42.69 ; RN2.8 64.895,3.022 65.84,3.967 66.451,3.967 v1(66.548,4.064) ; D3.2 v1(74.348,57.04) ; 80.518,54.766 80.568,54.717 80.568,54.019 C15.2 80.739,53.547 C15.2@80.568,53.376 ; 80.518,56.569 80.995,57.046 81.059,57.046 81.09,57.077 C16.1 ; L2.2@80.79,30.178 L2.2 L2.2@81.465,30.753
  Top Layer w1.27: v1(74.348,57.04) 74.659,57.04 78.323,53.376 ; R8.1 79.065,28.453 L2.2@80.79,30.178 ; 80.518,54.766 80.518,56.569 ; C15.2@80.568,53.376 78.012,53.376 76.325,51.689 76.325,37.465 81.465,32.325 L2.2@81.465,30.753
  Bottom Layer w1.27: v1(7.239,51.054) 14.859,58.674 72.714,58.674 v1(74.348,57.04) ; v1(66.548,4.064) 76.835,4.064 78.994,6.223 v1(78.994,26.416)
AOUT1: J1.4 U3.5 | length 12.7
  Top Layer w0.254: v1(11.43,41.529) 11.481,41.58 15.086,41.58 15.517,42.011 U3.5
  Bottom Layer w0.762: J1.4 9.858,39.29 10.397,39.829 10.397,40.358 11.43,41.392 v1(11.43,41.529)
AOUT2: J1.3 U3.7 | length 13.3
  Top Layer w0.254: v1(13.056,40.691) 13.331,40.691 13.833,40.188 15.215,40.188 15.642,40.614 16.394,40.614 16.491,40.711 U3.7
  Bottom Layer w0.762: J1.3 9.155,36.79 v1(13.056,40.691)
BOUT1: J1.2 U3.10 | length 13.5
  Top Layer w0.254: v1(13.208,39.04) 13.483,39.04 14.042,38.481 16.24,38.481 16.52,38.761 U3.10
  Bottom Layer w0.762: J1.2 8.458,34.29 v1(13.208,39.04)
BOUT2: J1.1 U3.8 | length 28.5
  Top Layer w0.254: v1(17.399,45.974) 18.449,44.924 18.449,40.461 18.27,40.282 18.241,40.282 18.02,40.061 U3.8
  Bottom Layer w0.762: J1.1 6.482,31.924 9.079,31.924 9.525,32.371 9.525,32.935 12.608,36.017 14.681,36.017 17.399,38.735 v1(17.399,45.974)
GND: C1.1 C2.2 C3.1 C4.1 C5.1 C6.2 C7.2 C8.1 C9.1 C10.2 C13.2 C16.2 C17.2 C18.2 C20.2 C21.2 C22.2 D2.1 DISPLAY.4 IC1.1 ICSP1.6 J3.2 J3.3 MOTOR.2 POWER.1 PS1.1 PWRIN_J1.2 R4.2 R5.2 R6.2 R9.2 R10.2 R11.1 SENSOR_2.1 SW1.3 SW1.4 TXRX_1.2 U1.3 U1.5 U1.21 U2.2 U3.14 U3.21 U3.28 U3.29 VR1.3 Y1.2 | length 445.1
  Top Layer w0.254: R4.2 14.814,39.471 15.849,39.471 v1(16.002,39.624) ; v1(17.221,35.027) 17.221,36.113 17.269,36.161 U3.14 ; U3.29@21.821,42.849 21.821,43.592 22.62,44.39 22.649,44.39 22.87,44.611 U3.28 ; U3.29@21.868,40.061 U3.21 ; 31.09,38.887 31.09,40.06 U2.2 ; C3.1 45.752,22.46 U1.5 ; C4.1 45.733,25.273 46.692,25.273 47.905,24.06 U1.3 ; v1(54.61,22.479) 55.373,23.242 57.062,23.242 U1.21 58.845,23.26 60.797,25.212 60.797,25.25 61.132,25.585 C2.2 61.855,25.25 62.892,25.25 63.144,24.997 63.144,22.377 61.991,21.224 C1.1
  Top Layer w0.762: SENSOR_2.1 6.856,10.615 4.851,12.62 4.851,20.041 8.396,23.585 12.365,23.585 17.991,29.211 17.991,29.229 VR1.3 18.21,31.255 ; C7.2 8.098,45.236 9.24,44.094 v1(9.652,44.094) ; v1(11.379,48.438) 15.138,48.438 16.408,47.168 20.168,47.168 20.445,46.89 v3(20.445,42.586) ; C9.1 11.853,36.39 11.878,36.39 12.984,35.284 12.984,34.971 v1(13.081,34.874) 13.081,34.88 14.635,36.434 C8.1 ; R5.2@16.585,32.906 16.585,32.88 18.21,31.255 ; v2@19.645,37.796 C13.2 19.516,33.907 19.516,33.588 18.21,32.282 18.21,31.255 ; v1(28.169,37.592) 28.306,37.592 29.362,38.648 30.85,38.648 ; v1@28.266,37.495 28.266,36.537 30.404,34.399 30.404,34.299 C10.2 ; 31.09,38.887 30.85,38.648 ; SW1.4 40.654,35.158 40.654,30.348 C6.2 40.864,30.332 42.485,28.711 42.485,23.916 v1(43.906,22.494) C3.1 ; TXRX_1.2 42.789,6.909 43.688,6.909 51.079,14.3 53.391,14.3 54.819,12.872 54.819,12.311 R11.1 ; v1@44.094,17.856 45.454,17.856 Y1.2 ; v1@45.695,26.594 45.718,26.57 C4.1 ; C20.2 v1(54.1,48.08) 54.1,45.346 DISPLAY.4 52.165,43.568 48.285,47.447 42.993,47.447 40.67,45.124 SW1.3 37.53,44.074 33.604,40.148 33.604,39.094 33.158,38.648 30.85,38.648 ; R11.1@54.963,12.217 54.989,12.192 v1(56.82,12.192) ; C21.2@61.198,43.18 PS1.1 ; C21.2 61.036,43.004 61.036,38.301 62.736,36.601 C22.2 62.736,34.598 64.26,33.074 C5.1 65.823,30.976 v1(65.843,30.957) 70.897,30.957 72.656,29.198 72.656,17.666 75.336,14.986 R10.2 79.548,8.886 PWRIN_J1.2 ; v1(65.911,26.389) R6.2 66.584,24.807 67.996,23.395 67.996,16.892 67.124,16.021 ICSP1.6 ; MOTOR.2 69.086,3.961 69.255,4.13 POWER.1 77.788,4.13 78.883,5.226 PWRIN_J1.2 ; C16.2 94.685,57.315 101.296,50.704 101.296,49.372 D2.1 101.344,49.259 102.151,48.452 102.189,48.452 102.995,47.646 102.995,36.427 102.549,35.981 101.638,35.981 v1(101.598,35.941) ; v1(93.978,35.433) 94.075,35.336 94.742,35.336 IC1.1@96.061,34.017 ; IC1.1 96.117,30.661 96.142,30.636 96.142,30.278 96.547,29.873 C17.2 C18.2 96.547,26.675 95.222,25.35 R9.2 95.222,9.602 95.248,9.576 ; J3.3 102.259,12.276 99.752,9.769 97.752,9.769 J3.2 95.248,9.576 ; PWRIN_J1.2 87.558,9.576 95.248,9.576
  Top Layer w1.27: R11.1 R11.1@54.963,12.217
  Bottom Layer w0.762: v1(9.652,44.094) 11.379,45.822 v1(11.379,48.438) ; v1(13.081,34.874) 13.157,34.95 17.145,34.95 v1(17.221,35.027) 17.286,35.027 v3(20.445,38.186) ; v1(16.002,39.624) 16.002,46.736 16.764,47.498 19.999,47.498 20.445,47.052 v3(20.445,42.586) ; v3(21.545,38.186) 22.139,37.592 v1(28.169,37.592) ; v1(45.745,26.848) 43.906,25.009 v1(43.906,22.494) 43.848,22.436 43.848,17.94 v1(43.79,17.882) 43.79,13.691 45.618,11.862 v1(48.87,11.862) ; v1(54.1,48.08) 60.541,48.08 61.026,48.565 v1(61.163,48.565) ; v1(54.61,22.479) 54.61,22.342 53.492,21.224 53.492,18.914 56.82,15.587 v1(56.82,12.192) ; v1(59.436,24.028) 64.567,24.028 65.911,25.373 v1(65.911,26.389) 65.877,26.423 65.877,30.923 v1(65.843,30.957) ; v1(93.978,35.433) 100.953,35.433 101.461,35.941 v1(101.598,35.941)
  other v2: 19.345,38.186 20.445,38.186 21.545,38.186 19.345,39.286 20.445,39.286 21.545,39.286 20.418,40.358 19.345,40.386 21.545,40.386 19.345,41.486 20.445,41.486 21.545,41.486 19.345,42.586 20.445,42.586 21.545,42.586
  other v3: 19.345,38.186 19.345,39.286 20.445,39.286 21.545,39.286 19.345,40.386 20.445,40.386 21.545,40.386 19.345,41.486 20.445,41.486 21.545,41.486 19.345,42.586 21.545,42.586
INT_SW: R11.2 SWITCH-INT.2 U1.1 | length 29.9
  Top Layer w0.254: U1.1 49.255,25.66 51.562,23.353 v1(51.562,23.094) v1@51.562,22.835
  Top Layer w0.762: R11.2 51.796,12.134 51.796,5.284 SWITCH-INT.2
  Bottom Layer w0.762: v1(51.562,23.094) 51.562,22.956 52.4,22.118 52.4,5.992 51.854,5.446 SWITCH-INT.2
MISO: ICSP1.1 U1.16 | length 17
  Top Layer w0.254: v1@55.143,20.701 55.143,19.772 55.63,19.285 U1.16
  Top Layer w0.762: v1@62.027,11.43 62.044,11.447 ICSP1.1
  Bottom Layer w0.254: v1(55.067,20.955) 55.067,18.237 v1(62.078,11.227)
MODE0: S1.2 U3.24 | length 12.9
  Top Layer w0.254: U3.24 23.77,42.011 23.818,41.963 23.818,41.939 23.974,41.783 25.654,41.783
  Top Layer w0.762: 25.654,41.783 26.264,41.783 27.229,42.748 27.229,46.266 26.23,47.265 S1.2
MODE1: S1.4 U3.25 | length 14.1
  Top Layer w0.254: U3.25 24.627,42.661 24.689,42.723
  Top Layer w0.762: 24.689,42.723 25.298,42.723 25.984,43.409 25.984,46.253 24.638,47.6 24.638,51.748 S1.4
MODE2: S1.6 U3.26 | length 15.2
  Top Layer w0.254: U3.26 24.159,43.311 24.613,43.764 24.613,44.653
  Top Layer w0.762: 24.613,44.653 24.613,45.669 23.495,46.787 23.495,53.145 S1.6
MOSI: ICSP1.4 U1.15 | length 13.2
  Top Layer w0.254: U1.15 54.83,17.935 55.384,17.381 59.621,17.381 v1(60.833,18.593)
  Top Layer w0.762: ICSP1.4 v1@64.584,17.785
  Bottom Layer w0.254: v1(60.833,18.593) 63.784,18.593 64.317,18.059 v1(64.592,18.059)
NetC1_2: C1.2 L1.2 U1.18 | length 13.5
  Top Layer w0.254: U1.18 58.566,20.86 59.502,19.924 C1.2
  Top Layer w0.762: L1.2@65.29,19.964 v1(66.802,19.964)
  Bottom Layer w0.254: v1(59.182,20.244) 59.322,20.104 66.662,20.104 v1(66.802,19.964)
NetC2_1: C2.1 U1.20 | length 4.6
  Top Layer w0.254: U1.20 60.732,22.46 61.132,22.86 C2.1
NetC6_1: C6.1 R2.1 | length 3.1
  Top Layer w0.762: R2.1 C6.1
NetC11_1: C11.1 U3.3 | length 3.1
  Top Layer w0.254: C11.1 14.685,43.688 15.062,43.311 U3.3
NetC12_1: C12.1 U3.2 | length 3.9
  Top Layer w0.254: C12.1 14.349,45.474 15.862,43.961 U3.2
NetC12_2: C12.2 U3.1 | length 4
  Top Layer w0.254: C12.2 14.349,46.431 14.558,46.222 14.953,46.222 16.564,44.611 U3.1
NetC14_1: C14.1 D2.3 IC1.8 L2.1 R7.1 | length 33.1
  Top Layer w0.762: L2.1@81.86,40.058 L2.1 ; 95.624,39.878 96.117,39.385 IC1.8 C14.1@96.117,42.395 ; C14.1@96.131,42.418 96.131,46.876 D2.3
  Top Layer w1.27: R7.1 79.065,44.999 81.86,42.204 L2.1@81.86,40.058 ; L2.1 95.624,39.878
NetC14_2: C14.2 IC1.7 | length 3.5
  Top Layer w0.762: C14.2@97.02,42.418 97.387,42.051 IC1.7
NetC15_1: C15.1 C19.2 R7.2 | length 10.3
  Top Layer w0.254: R7.2 R7.2 C19.2
  Top Layer w0.762: C15.1 83.341,53.547 85.715,51.173 R7.2
NetC17_1: C17.1 C18.1 IC1.2 IC1.3 J3.1 PWRIN_J1.1 | length 37.1
  Top Layer w0.762: IC1.2 IC1.3 98.657,30.713 99.497,29.873 99.497,29.323 99.353,29.179 99.353,28.696 99.038,28.381 C18.1@99.038,26.95 ; 97.559,25.471 C18.1@99.038,26.95 ; C18.1 C18.1@99.038,26.95
  Top Layer w1.27: J3.1 97.559,25.471
  Bottom Layer w1.27: PWRIN_J1.1 95.849,15.367 97.351,15.367 J3.1
NetC19_1: C19.1 IC1.5 R8.2 R10.1 | length 46.9
  Top Layer w0.762: R10.1 85.632,15.07 85.632,22.294 R8.2 85.715,23.102 89.914,27.301 v1(89.914,38.227) ; C19.1@88.547,46.58 88.547,45.182 v1(88.644,45.085) ; IC1.5 v1(99.927,40.874)
  Bottom Layer w0.762: v1(88.644,45.085) 88.644,39.497 v1(89.914,38.227) 97.28,38.227 v1(99.927,40.874)
NetC21_1: C21.1 C22.1 D3.1 PS1.3 | length 21.9